# EAGLE board pcm2705_DAC (EAGLE 6.2)
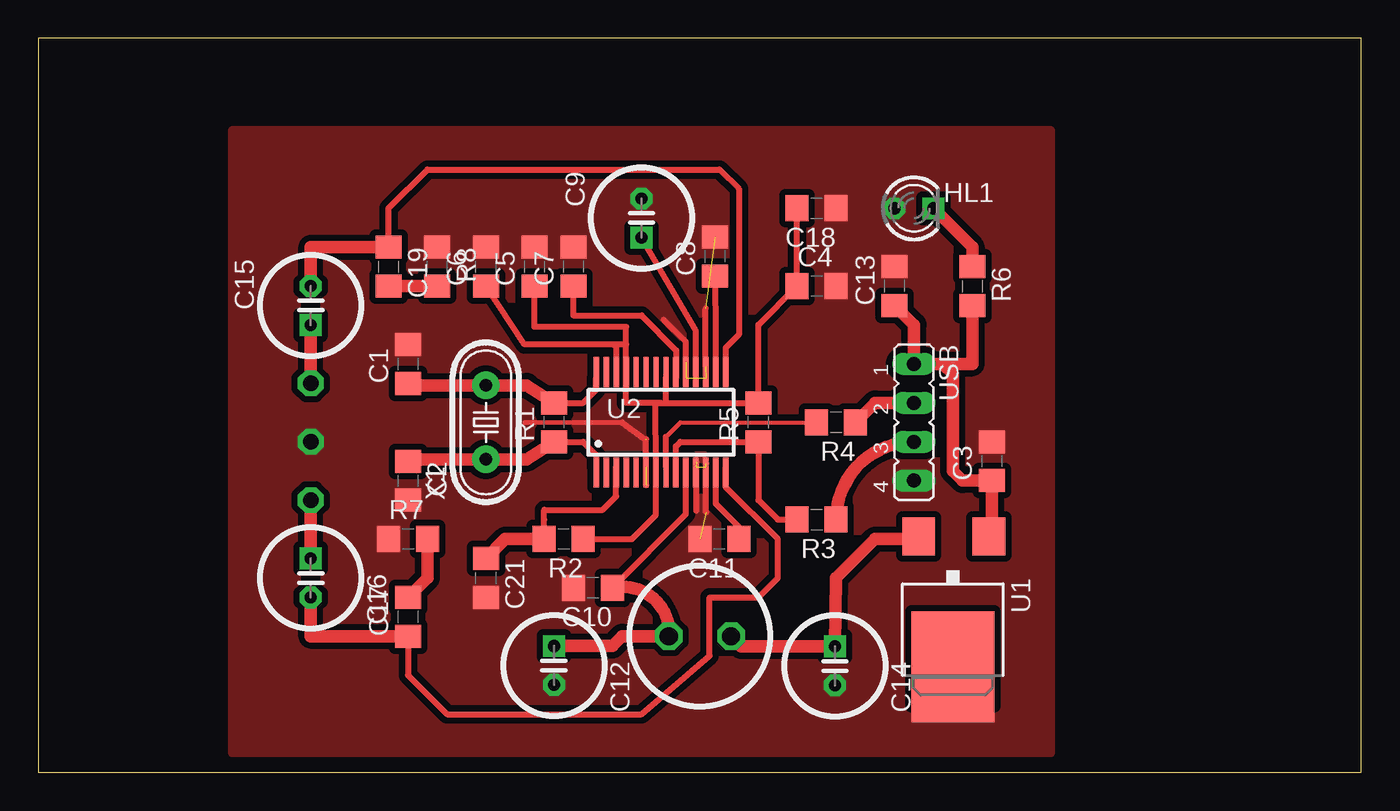
[diagram p0: board, top side]

Size 86.34 x 47.93 mm. Coordinates in mm from the lower left corner, seen from the top.
Outline: 0,0 86.34,0 86.34,47.93 0,47.93 0,0
Copper layers (1*16): Top 0.035mm / dielectric 1.5mm / Bottom 0.035mm
Design rules: minimum track width 10mil, minimum drill 24mil, track to track 8mil, track to pad 8mil, pad to pad 8mil, via to via 8mil, smd to smd 8mil, copper to edge 40mil, drill to drill 8mil, minimum pad ring 10mil, minimum via ring 8mil, stop-mask expansion 4mil, vias tented up to drill 0mil, thermal gap 10mil

## Footprints (pad centres in the part's own frame; a part is rotated, then mirrored left to right if it is on the bottom)
C0805D = smd 1.5 x 1.7: 1 -1.27,0; 2 1.27,0
C100MILX6X12 = drill 0.8 pad 1.422 octagon: MINUS 1.27,0 | drill 0.8 pad 1.422 square: PLUS -1.27,0
LED3MM = drill 0.8 pad 1.422 square: A 1.27,0 | drill 0.8 pad 1.422 octagon: K -1.27,0
INDUCTOR = drill 1.2 pad 1.676 octagon: P$1 -2.032,0; P$2 2.032,0
1_PIN_CON = drill 1 pad 1.676 octagon: P$1 0,0
R0805D = smd 1.5 x 1.7: P$1 -1.27,0; P$2 1.27,0
LF33_DPAK = smd 5.4 x 6.2: @GND1 0,3.77; @GND2 0,2.754 | smd 1 x 1.6: @IN1 -2.915,-5.689; @IN2 -1.772,-5.689; @IN3 -2.915,-4.8; @IN4 -1.772,-4.8; @OUT1 1.657,-4.8; @OUT2 1.657,-5.689; @OUT3 2.8,-5.689; @OUT4 2.8,-4.8; B -2.28,-4.8; B1 -2.28,-4.8; B6 -2.153,-5.689; B7 2.292,-4.8; B8 2.292,-4.8; B13 2.419,-5.689; E 2.28,-4.8
PCM2705-TSSOP28 = smd 0.35 x 1.2: 1 -4.225,-2.9; 2 -3.575,-2.9; 3 -2.925,-2.9; 4 -2.275,-2.9; 5 -1.625,-2.9; 6 -0.975,-2.9; 7 -0.325,-2.9; 8 0.325,-2.9; 9 0.975,-2.9; 10 1.625,-2.9; 11 2.275,-2.9; 12 2.925,-2.9; 13 3.575,-2.9; 14 4.225,-2.9; 15 4.225,2.9; 16 3.575,2.9; 17 2.925,2.9; 18 2.275,2.9; 19 1.625,2.9; 20 0.975,2.9; 21 0.325,2.9; 22 -0.325,2.9; 23 -0.975,2.9; 24 -1.625,2.9; 25 -2.275,2.9; 26 -2.925,2.9; 27 -3.575,2.9; 28 -4.225,2.9; 29 -4.225,3.662; 30 -3.575,3.662; 31 -2.925,3.662; 32 -2.275,3.662; 33 -1.625,3.662; 34 -0.975,3.662; 35 -0.325,3.662; 36 0.325,3.662; 37 0.975,3.662; 38 1.625,3.662; 39 2.275,3.662; 40 2.925,3.662; 41 3.575,3.662; 42 4.225,3.662; 43 -4.225,-3.662; 44 -3.575,-3.662; 45 -2.925,-3.662; 46 -2.275,-3.662; 47 -1.625,-3.662; 48 -0.975,-3.662; 49 -0.325,-3.662; 50 0.325,-3.662; 51 0.975,-3.662; 52 1.625,-3.535; 53 1.625,-3.662; 54 2.275,-3.662; 55 2.925,-3.662; 56 3.575,-3.662; 57 4.225,-3.662
JP4 = drill 0.914 long: 1 -3.81,0; 2 -1.27,0; 3 1.27,0; 4 3.81,0
HC49/S = drill 0.8 pad 1.778: 1 -2.413,0; 2 2.413,0

## Placement (x,y rotation side)
C1  33p  [C0805D]  24.13,26.67 90 top
C2  33p  [C0805D]  24.13,19.05 270 top
C3  0.1u  [C0805D]  62.23,20.32 90 top
C4  0.1u  [C0805D]  50.8,31.75 0 top
C5  0.1u  [C0805D]  32.38,33.02 90 top
C6  0.1u  [C0805D]  29.21,33.02 90 top
C7  1u  [C0805D]  34.92,33.02 90 top
C8  1u  [C0805D]  44.17,33.68 90 top
C9  10u  [C100MILX6X12]  39.37,36.2 90 top
C10  0.1u  [C0805D]  36.2,12.06 180 top
C11  1u  [C0805D]  44.45,15.24 180 top
C12  10u  [C100MILX6X12]  33.66,6.99 270 top
C13  0.1u  [C0805D]  55.88,31.75 90 top
C14  2.2u  [C100MILX6X12]  51.99,6.96 270 top
C15  100u  [C100MILX6X12]  17.78,30.48 90 top
C16  100u  [C100MILX6X12]  17.78,12.7 270 top
C17  22n  [C0805D]  24.13,10.16 90 top
C18  0.1u  [C0805D]  50.8,36.83 180 top
C19  22n  [C0805D]  22.86,33.02 270 top
C21  0.1u  [C0805D]  29.21,12.7 270 top
HL1  LED3MM  [LED3MM]  57.15,36.83 0 top
L1  INDUCTOR  [INDUCTOR]  43.18,8.89 180 top
P1  1_PIN_CON  [1_PIN_CON]  17.78,25.4 0 top
P2  1_PIN_CON  [1_PIN_CON]  17.78,17.78 0 top
P3  1_PIN_CON  [1_PIN_CON]  17.78,21.59 0 top
R1  1M  [R0805D]  33.66,22.86 90 top
R2  1k5  [R0805D]  34.29,15.24 180 top
R3  22R  [R0805D]  50.8,16.51 180 top
R4  22R  [R0805D]  52.07,22.86 180 top
R5  1k5  [R0805D]  46.99,22.86 90 top
R6  1k  [R0805D]  60.96,31.75 270 top
R7  1k5  [R0805D]  24.13,15.24 0 top
R8  1k5  [R0805D]  26.04,33.02 270 top
U1  LF33  [LF33_DPAK]  59.69,10.16 180 top
U2  PCM2705  [PCM2705-TSSOP28]  40.64,22.86 0 top
USB  [JP4]  57.15,22.86 270 top
X1  12  [HC49/S]  29.21,22.86 90 top

## Library data of the parts
C1-C19 C21 HL1 R1-R8 X1 = den
L1 P1-P3 U1 U2 = Dmitry
USB = jumper

## Nets
0V: C1.2 C2.2 C3.2 C4.2 C5.2 C6.2 C7.2 C8.2 C9.MINUS C10.2 C11.2 C12.MINUS C13.2 C14.MINUS C18.1 C21.2 HL1.K P3.P$1 R7.P$1 R8.P$1 U1.@GND1 U2.6 U2.11 U2.12 U2.17 U2.19 USB.4
+3.3V: C10.1 C12.PLUS L1.P$2 U2.10
+5V: C3.1 C13.1 R6.P$2 U1.@IN1 USB.1
N$1: C2.1 R1.P$1 U2.1 X1.1
N$2: C7.1 U2.20
N$3: C1.1 R1.P$2 U2.28 X1.2
N$4: C21.1 R2.P$2 U2.3
N$5: R3.P$2 R5.P$1 U2.9
N$6: R4.P$2 U2.8
N$7: R3.P$1 USB.3
N$8: R4.P$1 USB.2
N$9: HL1.A R6.P$1
N$10: C8.1 U2.16
N$11: C9.PLUS U2.18
N$12: C15.PLUS P1.P$1
N$13: C11.1 U2.13
N$14: C16.PLUS P2.P$1
N$15: U2.4
N$16: C14.PLUS L1.P$1 U1.@OUT1
N$17: C16.MINUS C17.1 U2.14
N$18: C17.2 R7.P$2
N$19: C15.MINUS C19.1 U2.15
N$20: C19.2 R8.P$2
VDD: C4.1 C5.1 C6.1 C18.2 R2.P$1 R5.P$2 U2.7 U2.21 U2.25 U2.26

## Tracks (layer width: path | path; a pad name or v marks a point on that pad's centre or on a via)
0V  (10 unrouted)
  Top 0.305: 31.75,22.86 38.1,22.86
  Top 0.406: 43.56,26.49 43.56,30.3 | 42.27,26.8 42.27,28.12 40.82,29.57 | 43.59,16.99 43.59,20.17 | 42.95,17.09 42.95,20.27 | 39.67,18.75 39.67,21.77 | 38.1,22.86 39.62,21.72
  pour Top (isolate 0.406, no thermals): 12.7,41.91 66.04,41.91 66.04,1.27 12.7,1.27
+3.3V
  Top 0.406: U2.10 42.27,16.86 C10.1
  Top 0.813: C10.1 arc-90 41.15,9.65 L1.P$2 38.1,8.89 37.47,8.26 C12.PLUS
+5V
  Top 0.813: U1.@IN1 62.23,16.22 C3.1 60.33,19.05 59.69,19.68 59.69,26.04 59.05,26.67 USB.1 | R6.P$2 60.96,26.67 USB.1 | USB.1 57.15,29.21 C13.1
N$1
  Top 0.406: U2.1 36.41,20.73 35.56,21.59 R1.P$1
  Top 0.813: C2.1 24.26,20.45 X1.1 31.88,20.45 R1.P$1
N$2
  Top 0.406: C7.1 34.92,29.84 39.37,29.84 41.63,27.56 U2.20
N$3
  Top 0.406: U2.28 36.41,24.98 35.56,24.13 R1.P$2
  Top 0.813: C1.1 24.26,25.27 X1.2 31.88,25.27 R1.P$2
N$4
  Top 0.406: R2.P$2 33.02,16.51 33.02,17.14 36.83,17.14 37.72,18.03 U2.3
  Top 0.813: R2.P$2 30.48,15.24 C21.1
N$5
  Top 0.406: R3.P$2 48.26,16.51 46.99,17.78 R5.P$1 41.91,21.59 41.62,21.3 U2.9
N$6
  Top 0.254: 41.91,22.86 R4.P$2
  Top 0.305: 40.97,21.91 41.91,22.86
  Top 0.406: U2.8 40.97,21.91
N$7
  Top 0.813: R3.P$1 arc-90 USB.3
N$8
  Top 0.813: USB.2 54.61,24.13 R4.P$1
N$9
  Top 0.813: HL1.A 60.96,34.29 R6.P$1
N$10
  Top 0.406: U2.16 44.22,29.84 C8.1
N$11
  Top 0.406: U2.18 42.91,28.84 C9.PLUS
N$12
  Top 0.813: P1.P$1 C15.PLUS
N$13
  Top 0.406: U2.13 44.22,17.55 45.72,16.04 C11.1
N$14
  Top 0.813: C16.PLUS P2.P$1
N$16
  Top 0.813: U1.@OUT1 57.75,15.24 54.61,15.24 52.07,12.7 C14.PLUS 45.87,8.23 L1.P$1
N$17
  Top 0.406: U2.14 44.87,18.64 48.26,15.24 48.26,12.7 46.99,11.43 43.81,11.43 43.81,7.62 39.37,3.81 26.67,3.81 24.13,6.35 C17.1
  Top 0.813: C16.MINUS 17.78,8.89 C17.1
N$18
  Top 0.813: C17.2 25.4,12.7 R7.P$2
N$19
  Top 0.406: U2.15 44.87,27.72 45.72,28.57 45.72,38.1 44.45,39.37 25.4,39.37 22.86,36.83 C19.1
  Top 0.813: C15.MINUS 17.78,34.29 C19.1
N$20
  Top 0.813: C19.2 R8.P$2
VDD
  Top 0.406: U2.25 38.37,24.13 40.64,24.13 | 40.64,24.13 40.29,24.14 U2.7 40.31,16.82 38.73,15.24 R2.P$1 | 40.64,24.13 40.97,24.13 U2.21 | U2.25 38.37,29.09 37.72,29.09 37.08,29.08 32.38,29.08 C5.1 | C18.2 C4.1 46.99,29.21 R5.P$2 40.64,24.13 | U2.26 37.72,27.94 37.47,27.94 | 37.47,27.94 31.75,27.94 C6.1 | U2.25 38.37,27.94 37.47,27.94

## Text on the board
Pads: R | L